# EAGLE board MC3PHAC1 (EAGLE 6.0)
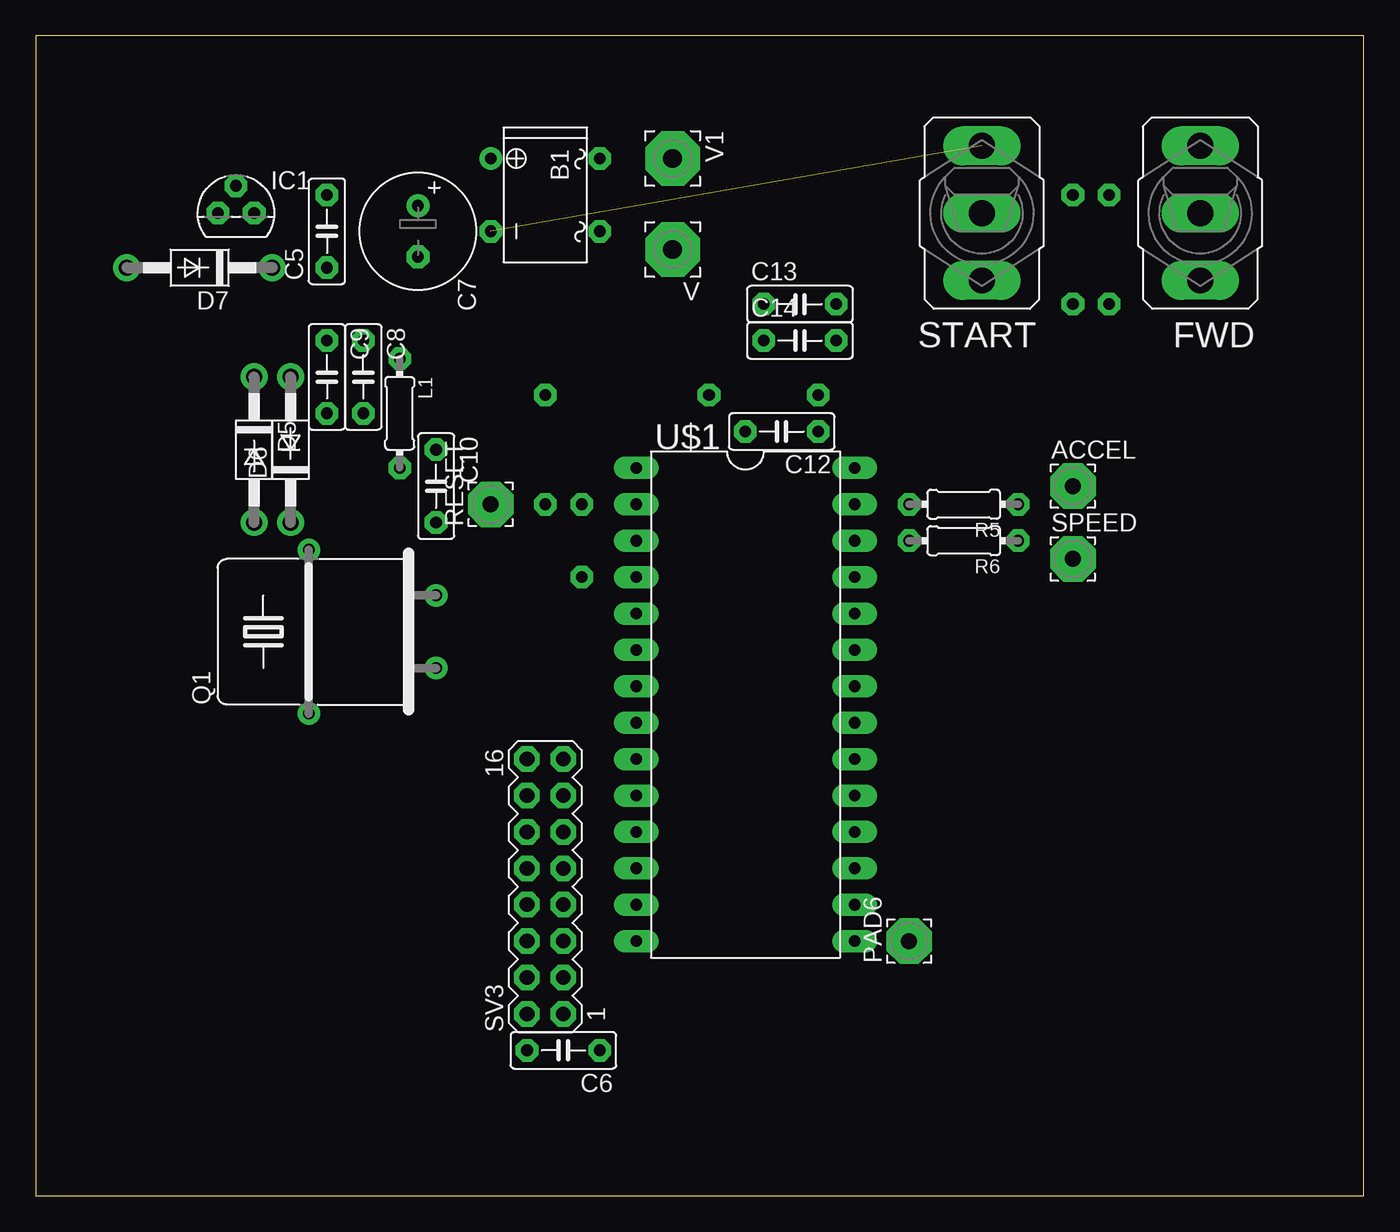
[diagram p0: board, top side]
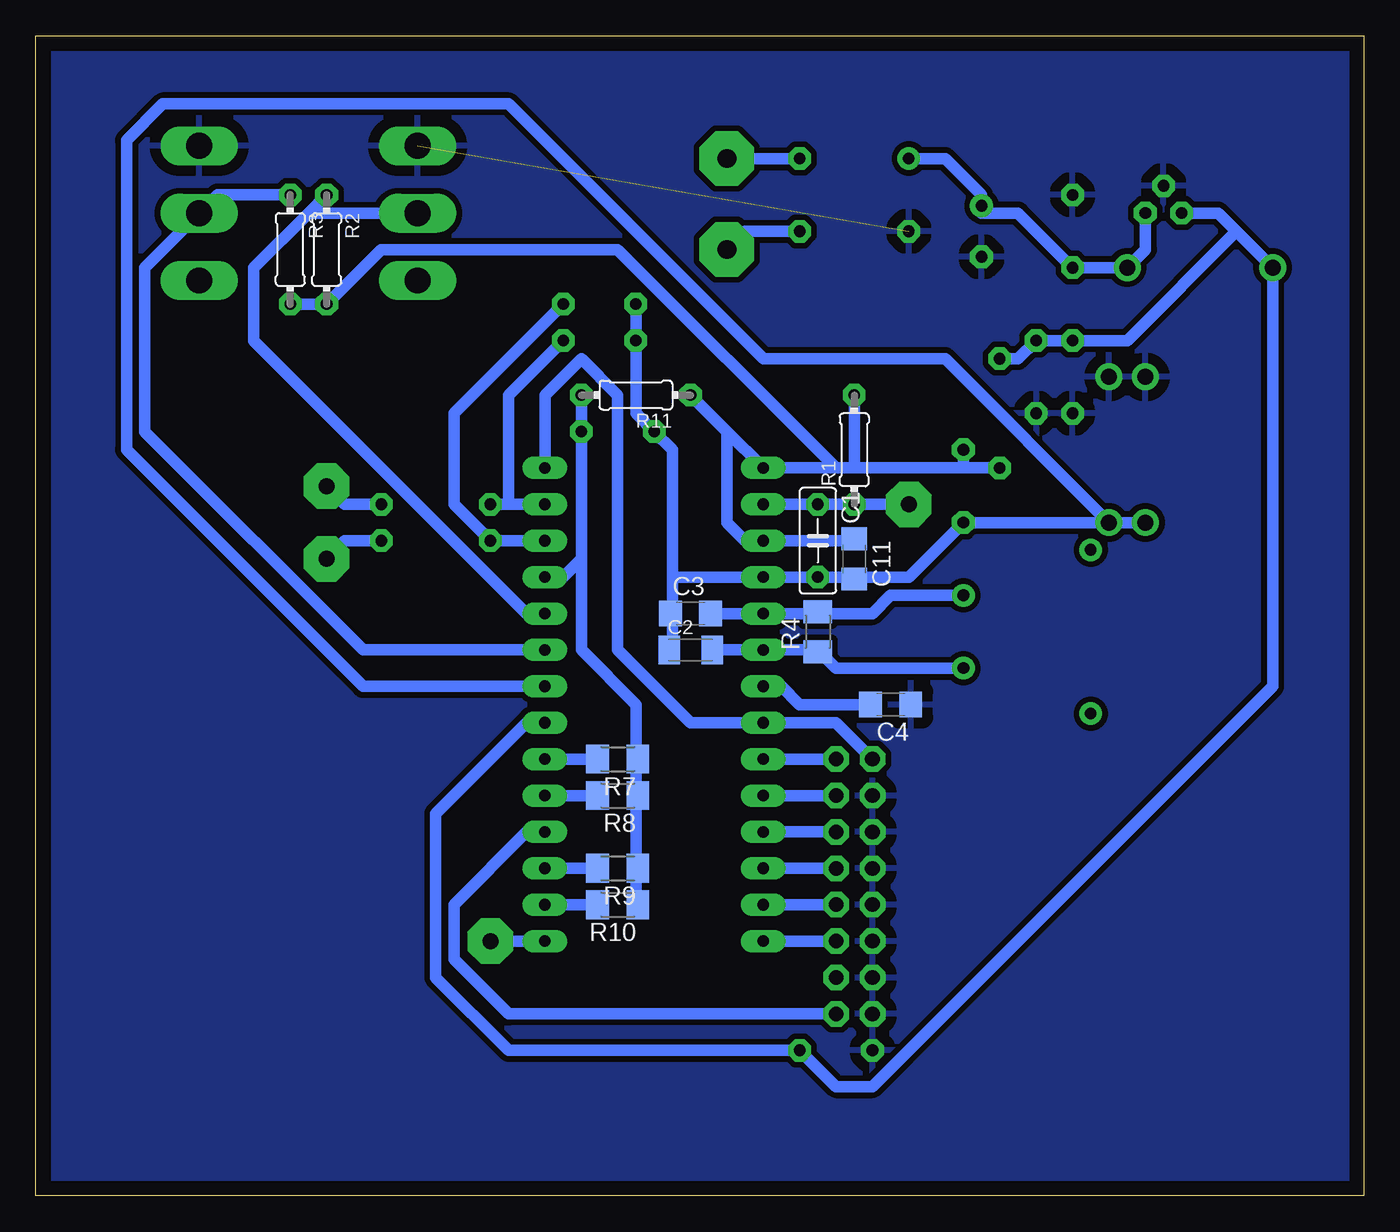
[diagram p1: board, bottom side, seen from below]

Size 92.69 x 80.95 mm. Coordinates in mm from the lower left corner, seen from the top.
Outline: 0,0 92.69,0 92.69,80.95 0,80.95 0,0
Copper layers (1*16): Top 0.035mm / dielectric 1.5mm / Bottom 0.035mm
Design rules: minimum track width 10mil, minimum drill 24mil, track to track 16mil, track to pad 16mil, pad to pad 16mil, via to via 16mil, smd to smd 20mil, copper to edge 40mil, drill to drill 8mil, minimum pad ring 15mil, minimum via ring 8mil, stop-mask expansion 4mil, vias tented up to drill 0mil, thermal gap 30mil
Net classes: 0 default: width 0.8 mm

## Footprints (pad centres in the part's own frame; a part is rotated, then mirrored left to right if it is on the bottom)
3,17/1,1 = drill 1.118 pad 3.175 octagon: 1 0,0
B-DIL = drill 0.813: + -2.54,-3.81 | drill 0.813 octagon: - 2.54,-3.81; AC1 2.54,3.81; AC2 -2.54,3.81
C050-025X075 = drill 0.813 octagon: 1 -2.54,0; 2 2.54,0
C1206K = smd 1.5 x 2: 1 -1.5,0; 2 1.5,0
C1206 = smd 1.6 x 1.8: 1 -1.4,0; 2 1.4,0
E3,5-8 = drill 0.813 pad 1.6: + -1.778,0 | drill 0.813 pad 1.6 octagon: - 1.778,0
DO41-10 = drill 1.118: A 5.08,0; C -5.08,0
M9040P = drill 1.803 long: 1 0,4.699; 2 0,0; 3 0,-4.699
TO92 = drill 0.813 octagon: 1 -1.27,0; 2 0,1.905; 3 1.27,0
0204/7 = drill 0.813 octagon: 1 -3.81,0; 2 3.81,0
HC18U-H = drill 0.813: 1 -2.54,-5.08; 2 2.54,-5.08; M -5.715,3.81; M1 5.715,3.81
M1206 = smd 1.6 x 2: 1 -1.4,0; 2 1.4,0
MA08-2 = drill 1.016 octagon: 1 -8.89,-1.27; 2 -8.89,1.27; 3 -6.35,-1.27; 4 -6.35,1.27; 5 -3.81,-1.27; 6 -3.81,1.27; 7 -1.27,-1.27; 8 -1.27,1.27; 9 1.27,-1.27; 10 1.27,1.27; 11 3.81,-1.27; 12 3.81,1.27; 13 6.35,-1.27; 14 6.35,1.27; 15 8.89,-1.27; 16 8.89,1.27
DIP-28 = drill 0.813 long: 1 -16.51,-7.62; 2 -13.97,-7.62; 3 -11.43,-7.62; 4 -8.89,-7.62; 5 -6.35,-7.62; 6 -3.81,-7.62; 7 -1.27,-7.62; 8 1.27,-7.62; 9 3.81,-7.62; 10 6.35,-7.62; 11 8.89,-7.62; 12 11.43,-7.62; 13 13.97,-7.62; 14 16.51,-7.62; 15 16.51,7.62; 16 13.97,7.62; 17 11.43,7.62; 18 8.89,7.62; 19 6.35,7.62; 20 3.81,7.62; 21 1.27,7.62; 22 -1.27,7.62; 23 -3.81,7.62; 24 -6.35,7.62; 25 -8.89,7.62; 26 -11.43,7.62; 27 -13.97,7.62; 28 -16.51,7.62
3,81/1,3 = drill 1.321 pad 3.81 octagon: 1 0,0

## Placement (x,y rotation side)
ACCEL  [3,17/1,1]  72.39,49.53 0 top
B1  [B-DIL]  35.56,69.85 270 top
C1  100n  [C050-025X075]  38.1,45.72 270 bottom
C2  22p  [C1206K]  46.99,38.1 0 bottom
C3  22p  [C1206]  46.99,40.64 0 bottom
C4  100n  [C1206]  33.02,34.29 180 bottom
C5  [C050-025X075]  20.32,67.31 90 top
C6  [C050-025X075]  36.83,10.16 180 top
C7  [E3,5-8]  26.67,67.31 270 top
C8  [C050-025X075]  22.86,57.15 270 top
C9  [C050-025X075]  20.32,57.15 270 top
C10  [C050-025X075]  27.94,49.53 270 top
C11  [C1206]  35.56,44.45 270 bottom
C12  100n  [C050-025X075]  52.07,53.34 180 top
C13  [C050-025X075]  53.34,62.23 0 top
C14  [C050-025X075]  53.34,59.69 0 top
D5  1N4004  [DO41-10]  15.24,52.07 270 top
D6  1N4004  [DO41-10]  17.78,52.07 90 top
D7  1N4004  [DO41-10]  11.43,64.77 180 top
FWD  [M9040P]  81.28,68.58 180 top
IC1  7805L  [TO92]  13.97,68.58 0 top
L1  [0204/7]  25.4,54.61 270 top
PAD6  [3,17/1,1]  60.96,17.78 90 top
Q1  [HC18U-H]  22.86,39.37 90 top
R1  10k  [0204/7]  35.56,52.07 90 bottom
R2  10k  [0204/7]  72.39,66.04 270 bottom
R3  10k  [0204/7]  74.93,66.04 270 bottom
R4  10M  [M1206]  38.1,39.37 90 bottom
R5  4k7  [0204/7]  64.77,48.26 180 top
R6  4k7  [0204/7]  64.77,45.72 180 top
R7  10k  [M1206]  52.07,30.48 180 bottom
R8  10k  [M1206]  52.07,27.94 180 bottom
R9  10k  [M1206]  52.07,22.86 180 bottom
R10  10k  [M1206]  52.07,20.32 180 bottom
R11  10k  [0204/7]  50.8,55.88 180 bottom
RESET  [3,17/1,1]  31.75,48.26 90 top
SPEED  [3,17/1,1]  72.39,44.45 0 top
START  [M9040P]  66.04,68.58 180 top
SV3  [MA08-2]  35.56,21.59 90 top
U$1  MC3PHAC  [DIP-28]  49.53,34.29 270 top
V  V  [3,81/1,3]  44.45,66.04 180 top
V1  V  [3,81/1,3]  44.45,72.39 270 top

## Library data of the parts
ACCEL PAD6 RESET SPEED V V1 = wirepad
B1 = rectifier
C1-C14 L1 R1-R11 = rcl
D5-D7 = diode
FWD START = switch
IC1 = linear
Q1 = crystal
SV3 = con-lstb
U$1 = freescale

## Nets
+3V3: C6.1 C8.1 C9.1 D7.A IC1.1 L1.1 U$1.21
+5VANALOG: C10.1 C11.1 L1.2 R1.2 R2.2 R3.2 R11.1 U$1.1 U$1.3
GND: B1.- C4.1 C5.2 C6.2 C7.- C8.2 C9.2 D5.C D6.A FWD.3 IC1.2 START.3 SV3.2 SV3.4 SV3.6 SV3.8 SV3.10 SV3.12 SV3.14
GNDA: C1.2 C2.1 C3.1 C10.2 C11.2 C12.2 C13.1 C14.1 D5.A D6.C U$1.4 U$1.22
N$1: C1.1 R1.1 RESET.1 U$1.2
N$2: R2.1 START.2 U$1.24
N$3: FWD.2 R3.1 U$1.23
N$4: C3.2 Q1.2 R4.2 U$1.5
N$5: C2.2 Q1.1 R4.1 U$1.6
N$6: C14.2 R5.2 U$1.27
N$7: C4.2 U$1.7
N$8: SV3.16 U$1.8 U$1.28
N$9: C13.2 R6.2 U$1.26
N$10: ACCEL.1 R5.1
N$11: R6.1 SPEED.1
N$12: SV3.1 U$1.18
N$13: PAD6.1 U$1.15
N$14: C12.1 R7.1 R8.1 R9.1 R10.1 R11.2 U$1.25
N$15: R7.2 U$1.20
N$16: R8.2 U$1.19
N$17: R9.2 U$1.17
N$18: R10.2 U$1.16
N$19: SV3.5 U$1.14
N$20: SV3.7 U$1.13
N$21: SV3.9 U$1.12
N$22: SV3.11 U$1.11
N$23: SV3.13 U$1.10
N$24: SV3.15 U$1.9
N$25: B1.AC2 V1.1
N$26: B1.+ C5.1 C7.+ D7.C IC1.3
N$27: B1.AC1 V.1

## Tracks (layer width: path | path; a pad name or v marks a point on that pad's centre or on a via)
+3V3
  Bottom 0.8: L1.1 24.13,58.42 C8.1 C9.1 16.51,59.69 8.89,67.31 | IC1.1 10.16,68.58 8.89,67.31 | 8.89,67.31 D7.A 6.35,35.56 34.29,7.62 36.83,7.62 C6.1 59.69,10.16 64.77,15.24 64.77,26.67 58.42,33.02 U$1.21
+5VANALOG
  Bottom 0.8: C11.1 35.56,45.72 U$1.3 43.18,45.72 44.45,46.99 44.45,53.34 | R3.2 R2.2 68.58,66.04 52.07,66.04 36.83,50.8 | 36.83,50.8 U$1.1 44.45,53.34 | 36.83,50.8 35.56,50.8 | 35.56,50.8 27.94,50.8 | 27.94,50.8 L1.2 | 27.94,50.8 C10.1 | 35.56,50.8 R1.2 | 44.45,53.34 R11.1
GND  (1 unrouted)
  pour Bottom: 0,80.01 91.44,80.01 91.44,0 0,0
GNDA
  Bottom 0.8: 35.56,43.18 C1.2 U$1.4 48.26,43.18 | C13.1 C14.1 50.8,54.61 C12.2 48.26,52.07 48.26,43.18 | 48.26,40.64 48.26,38.1 C2.1 | 48.26,43.18 48.26,40.64 | 48.26,40.64 C3.1 | U$1.22 69.85,35.56 86.36,52.07 86.36,73.66 83.82,76.2 59.69,76.2 41.91,58.42 29.21,58.42 D6.C | D6.C C10.2 31.75,43.18 35.56,43.18 | D6.C D5.A | 35.56,43.18 C11.2
N$1
  Bottom 0.8: U$1.2 C1.1 R1.1 RESET.1
N$2
  Bottom 0.8: U$1.24 58.42,40.64 77.47,59.69 77.47,64.77 73.66,68.58 | R2.1 73.66,68.58 | 73.66,68.58 START.2
N$3
  Bottom 0.8: U$1.23 69.85,38.1 85.09,53.34 85.09,64.77 FWD.2 80.01,69.85 R3.1
N$4
  Bottom 0.8: 45.72,40.64 C3.2 U$1.5 38.1,40.64 | Q1.2 33.02,41.91 34.29,40.64 38.1,40.64 | 38.1,40.64 R4.2
N$5
  Bottom 0.8: 38.1,38.1 U$1.6 C2.2 45.72,38.1 | Q1.1 36.83,36.83 38.1,38.1 | 38.1,38.1 R4.1
N$6
  Bottom 0.8: R5.2 59.69,48.26 | 59.69,48.26 U$1.27 | C14.2 59.69,55.88 59.69,48.26
N$7
  Bottom 0.8: U$1.7 40.64,35.56 39.37,34.29 C4.2 34.29,34.29
N$8
  Bottom 0.8: SV3.16 36.83,33.02 U$1.8 46.99,33.02 52.07,38.1 52.07,55.88 54.61,58.42 57.15,55.88 U$1.28
N$9
  Bottom 0.8: U$1.26 R6.2 63.5,48.26 63.5,54.61 C13.2
N$10
  Bottom 0.8: R5.1 71.12,48.26 ACCEL.1
N$11
  Bottom 0.8: R6.1 71.12,45.72 SPEED.1
N$12
  Bottom 0.8: U$1.18 58.42,25.4 63.5,20.32 63.5,16.51 59.69,12.7 SV3.1
N$13
  Bottom 0.8: PAD6.1 U$1.15
N$14
  Bottom 0.8: 50.8,22.86 50.8,20.32 R10.1 | 50.8,30.48 50.8,27.94 | 50.8,27.94 50.8,22.86 | 50.8,22.86 R9.1 | 50.8,27.94 R8.1 | R11.2 C12.1 54.61,44.45 | U$1.25 55.88,43.18 54.61,44.45 | 50.8,30.48 50.8,34.29 54.61,38.1 54.61,44.45 | 50.8,30.48 R7.1
N$15
  Bottom 0.8: U$1.20 R7.2 53.34,30.48
N$16
  Bottom 0.8: U$1.19 R8.2 53.34,27.94
N$17
  Bottom 0.8: U$1.17 R9.2 53.34,22.86
N$18
  Bottom 0.8: U$1.16 R10.2 53.34,20.32
N$19
  Bottom 0.8: SV3.5 U$1.14
N$20
  Bottom 0.8: SV3.7 U$1.13
N$21
  Bottom 0.8: SV3.9 U$1.12
N$22
  Bottom 0.8: SV3.11 U$1.11
N$23
  Bottom 0.8: SV3.13 U$1.10
N$24
  Bottom 0.8: SV3.15 U$1.9
N$25
  Bottom 0.8: V1.1 B1.AC2
N$26
  Bottom 0.8: B1.+ 29.21,72.39 26.67,69.85 C7.+ 26.67,68.58 24.13,68.58 C5.1 D7.C 15.24,66.04 IC1.3
N$27
  Bottom 0.8: B1.AC1 43.18,67.31 V.1